# Altium PCB watch2q.PcbDoc
Units mil, origin at the board's own origin, x right, y up, seen from the top; angles counter-clockwise.
Board outline 1400 x 1450 mil, 2 copper layers (Top, Bottom), stack 61.902 mil thick; 64 components, 53 nets, 301 pads, 125 vias.
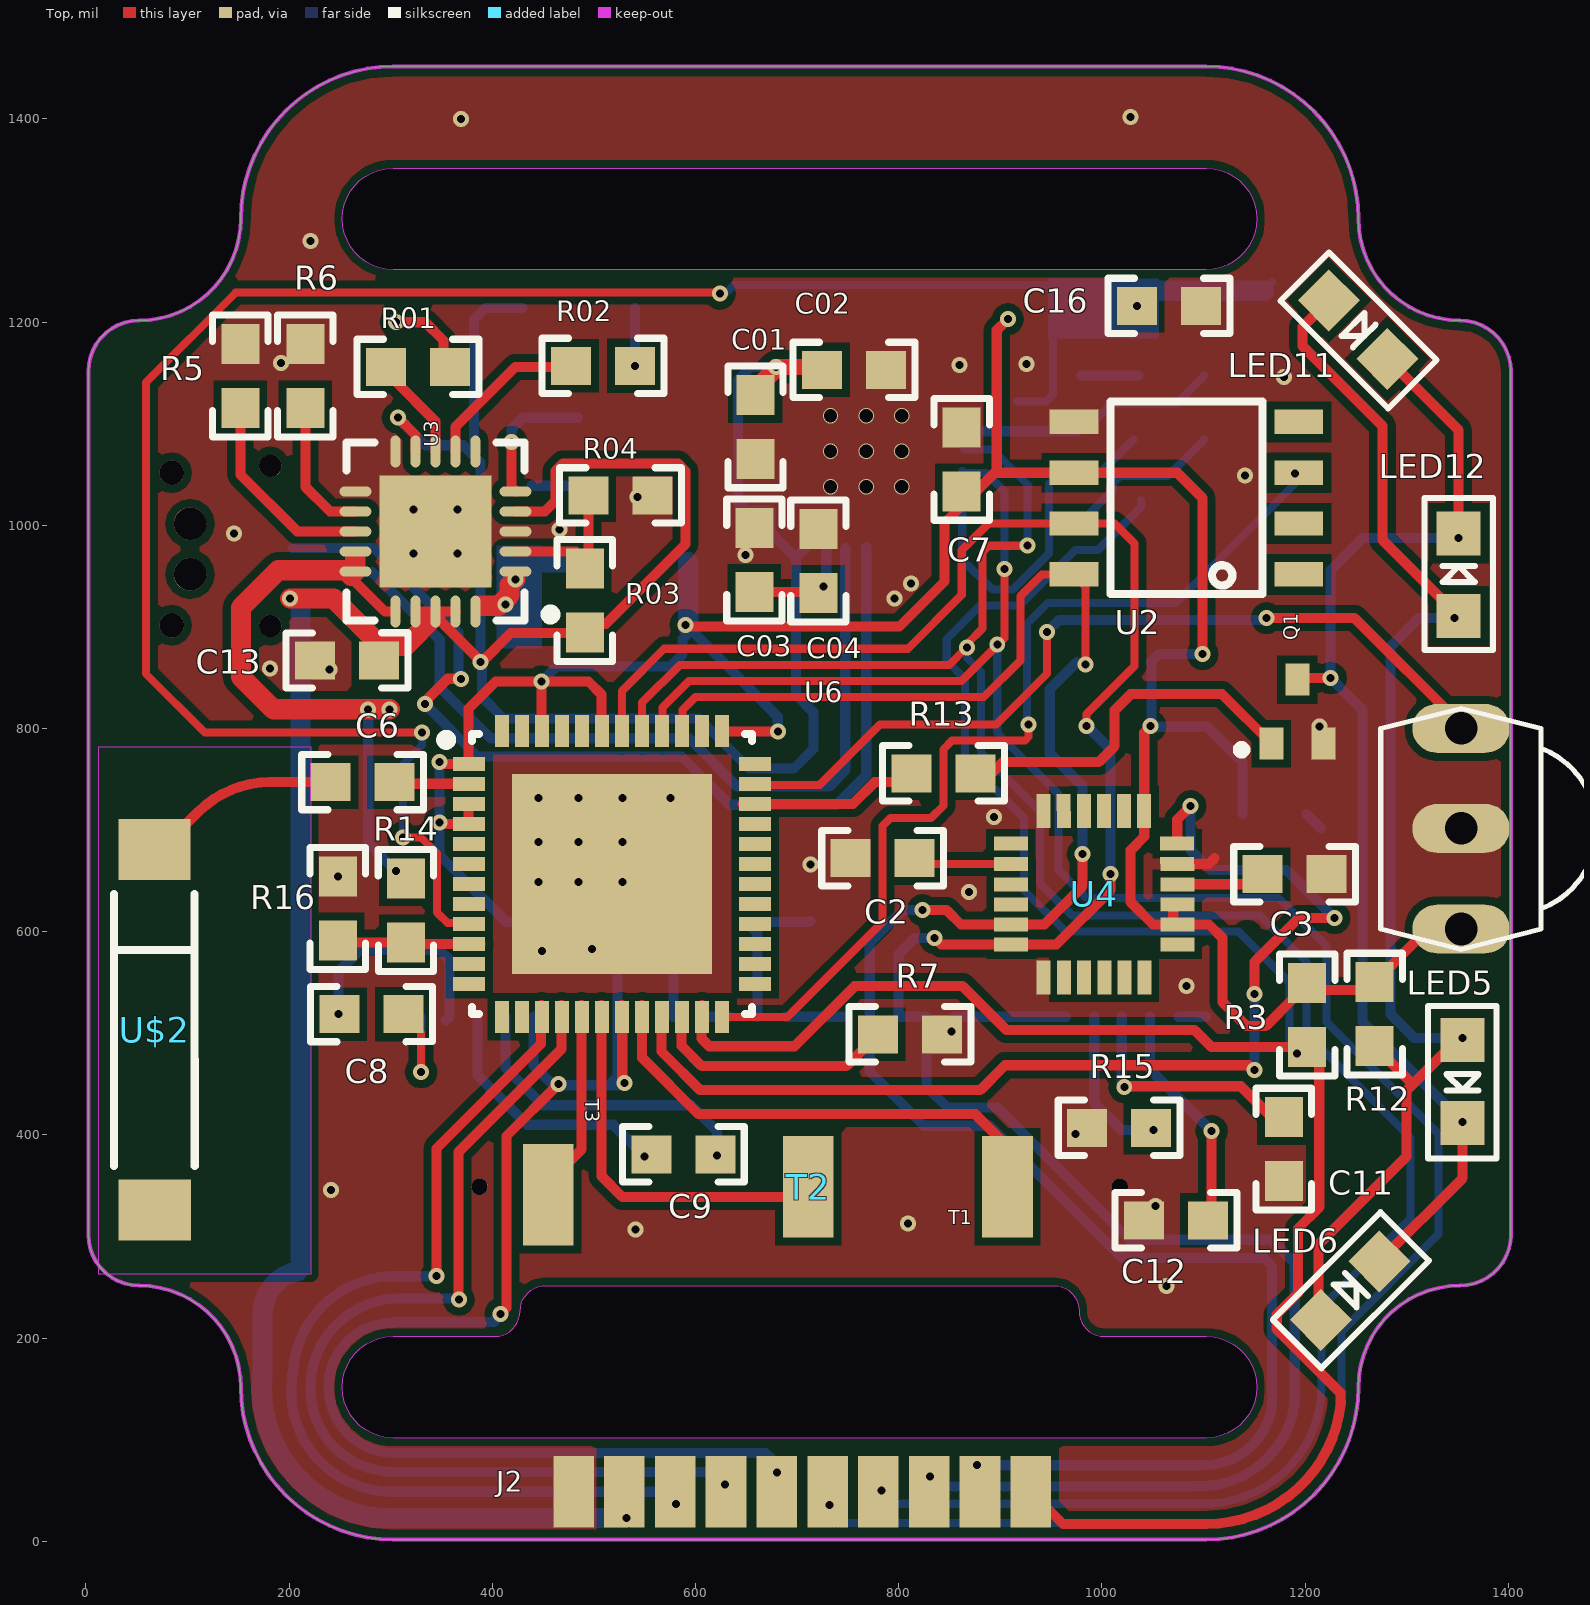
[diagram p0: Top view]
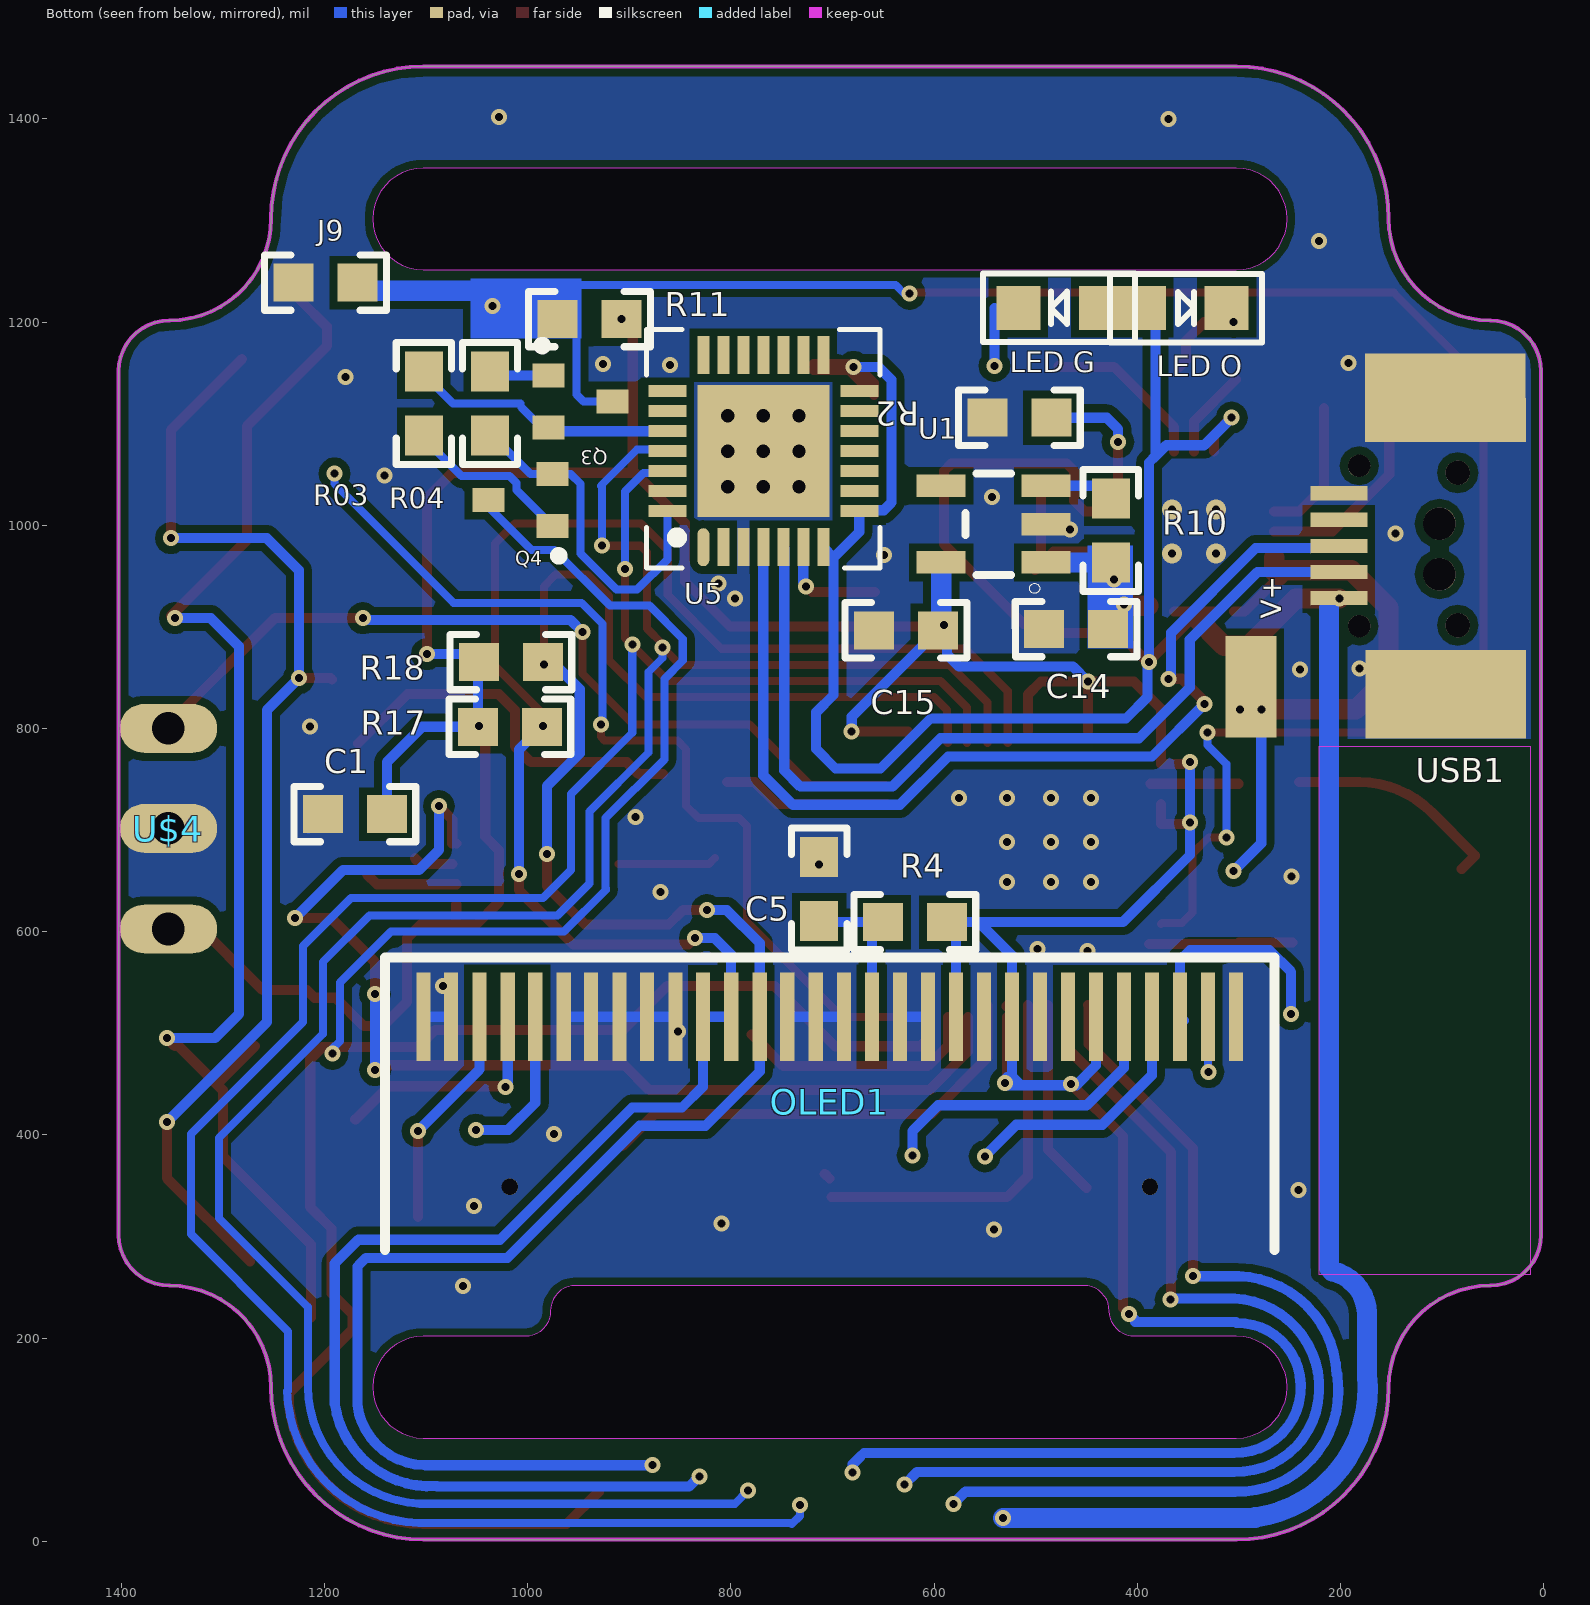
[diagram p1: Bottom view, seen from below]

## Layer stack, top to bottom
Top Solder: solder mask 0.4, Solder Resist, Dk 3.5
Top: signal copper 1.4016
Dielectric 1: core 59.0984, FR-4, Dk 4.8
Bottom: signal copper 1.4016
Bottom Solder: solder mask 0.4, Solder Resist, Dk 3.5

## Board outline
2.48,301.73 2.48,1151.73 cw(c52.48,1151.73) 52.48,1201.73 ccw(c52.48,1301.73) 152.48,1301.73 cw(c302.48,1301.73) 302.48,1451.73 1102.48,1451.73 cw(c1102.48,1301.73) 1252.48,1301.73 ccw(c1352.48,1301.73) 1352.48,1201.73 cw(c1352.48,1151.73) 1402.48,1151.73 1402.48,301.73 cw(c1352.48,301.73) 1352.48,251.73 ccw(c1352.48,151.73) 1252.48,151.73 cw(c1102.48,151.73) 1102.48,1.73 302.48,1.73 cw(c302.48,151.73) 152.48,151.73 ccw(c52.48,151.73) 52.48,251.73 cw(c52.48,301.73)
cut-out: 1102.48,201.73 cw(c1102.48,151.73) 1152.48,151.73 cw(c1102.48,151.73) 1102.48,101.73 302.48,101.73 cw(c302.48,151.73) 252.48,151.73 cw(c302.48,151.73) 302.48,201.73 402.48,201.73 ccw(c402.48,226.73) 427.48,226.73 cw(c452.48,226.73) 452.48,251.73 952.48,251.73 cw(c952.48,226.73) 977.48,226.73 ccw(c1002.48,226.73) 1002.48,201.73
cut-out: 302.48,1351.73 1102.48,1351.73 cw(c1102.48,1301.73) 1152.48,1301.73 cw(c1102.48,1301.73) 1102.48,1251.73 302.48,1251.73 cw(c302.48,1301.73) 252.48,1301.73 cw(c302.48,1301.73)

## Design rules (kind name [scope] priority, off if disabled: settings)
Clearance [All] p1: gap=7.87
HoleSize HoleSize_1 [All] p1: absolutevalues=TRUE maxlimit=100000 minlimit=13 maxpercent=80.000 minpercent=20.000
HoleSize [All] p2: absolutevalues=TRUE maxlimit=100 minlimit=1 maxpercent=80.000 minpercent=20.000
HoleToHoleClearance mdViaViaSameLayer [All] p1: gap=8 allowstackedmicrovias=TRUE
HoleToHoleClearance [All] p2: gap=10 allowstackedmicrovias=TRUE
PasteMaskExpansion mlMinCreamFrame [All] p1: expansion=0
PasteMaskExpansion [All] p2: expansion=0
PolygonConnect PolygonConnect_VIA [InNet('GND')] p1: connectstyle=Direct reliefconductorwidth=10 reliefentries=4 polygonreliefangle="90 Angle" airgapwidth=10
PolygonConnect [All] p2: connectstyle=Relief reliefconductorwidth=10 reliefentries=4 polygonreliefangle="90 Angle" airgapwidth=10
RoutingVias [All] p1: holewidth=28 width=50 viastyle="Through Hole" minholewidth=28 minwidth=50 maxholewidth=28 maxwidth=50
SilkToSilkClearance [All] p1 off: silktosilkclearance=10
SilkToSolderMaskClearance [IsPad] p1 off: minsilkscreentomaskgap=10 clearancetoexposedcopper=TRUE
SolderMaskExpansion mlMinStopFrame [All] p1: expansion=4
SolderMaskExpansion [All] p2: expansion=4
Width Width_1 [All] p1: maxlimit=100000 minlimit=6 preferedwidth=10
Width [All] p2: maxlimit=10 minlimit=10 preferedwidth=10
25 further rules are at their usual default settings.

## Components (designator, comment, footprint, x,y, rotation, side; value= is the part's Value field where it differs from the comment)
C1 "0.01uf" 0603 1170.04,715.79 r179.99 bottom
C01 "1uf" 0603 659,1097 r270 top
C2 "2.2nf" 0603 784.21,672.48 r180.01 top
C02 "0.1" 0603 756,1153 r0 top
C3 "0.1uf" 0603 1189.72,656.73 r180.02 top
C03 "0.1u" 0603 658,966 r270 top
C04 "4.7u" 0603 721,965 r270 top
C5 "100n" 0603 713,642 r90 bottom
C6 "0.01uf" 0603 272.4,747.28 r0.01 top
C7 "100n" 0603 862,1065 r90 top
C8 "1u" 0603 281,519 r0.02 top
C9 "1u" 0603 588,381 r180.02 top
C11 "4u7" 0603 1179,386 r270 top
C12 "2u2" 0603 1073,316 r180 top
C13 "10uF" 0603 257,867 r0.01 top
C14 "10uF" 0603 460,898 r359.99 bottom
C15 "10uF" 0603 627.48,896.73 r0 bottom
C16 "100n" 0603 1066,1216 r0.02 top
J2 "CHAN_RAM" CHAN_RAM 755,-148 r180 top
J9 "RST" 0603 1199,1239 r0 bottom
LED5 "LED0805" CHIPLED_0805 1355.08,452.01 r180 top
LED6 "LED0805" CHIPLED_0805 1244.84,247.28 r315 top
LED11 "LED0805" CHIPLED_0805 1252.72,1192.17 r225 top
LED12 "LED0805" CHIPLED_0805 1351.14,952.01 r0 top
"LED G" "LED0805" CHIPLED_0805 477,1214 r90 bottom
"LED O" "LED0805" CHIPLED_0805 352,1214 r270 bottom
OLED1 "DISP_OLED_UG-2864HSWEG01_NOOUTLINEWATCH" ? 702.48,561.73 r0 top
Q1 "MMBT2222A" SOT-323 1192.48,816.73 r90 top
Q3 "MMBT2222A" SOT-323 948,1122 r180 bottom (schematic designator Q1)
Q4 "MMBT2222A" SOT-323 1007,1025 r0 bottom (schematic designator Q1)
R01 "1K" 0603 327,1156 r180 top
R02 "1K" 0603 509,1157 r180 top
R2 "16K" 0603 516,1106 r0 bottom
R03 "270k" 0603 491,926 r90 top
R3 "10K" 0603 1202,518 r270.01 top
R03 "10K" 0603 1102,1120 r90 bottom
R04 "100K" 0603 526.13,1029.43 r0 top
R4 "RESISTOR0603" 0603 618.86,609.49 r179.98 bottom
R04 "10K" 0603 1037,1120 r90 bottom
R5 "4K" 0603 152,1147 r90 top
R6 "100K" 0603 216,1147 r90 top
R7 "10K" 0603 811,499 r0 top
R10 "100K" 0603 426,995 r270 bottom
R11 "100K" 0603 939,1203 r180 bottom
R12 "100K" 0603 1268.46,518.94 r270 top
R13 "4.7k" 0603 844,756 r0 top
R14 "100K" 0603 315,621 r270.01 top
R15 "390K" 0603 1017,407 r0.02 top
R16 "100K" 0603 248,623 r90 top
R17 "10K" 0603 1017.48,801.73 r179.98 bottom
R18 "10K" 0603 1016.5,865.39 r179.98 bottom
T1 "SMD2" SMD1,27-2,54#1 907,349 r180.01 top
T2 "SMD2" SMD1,27-2,54#2 711,349 r180.01 top
T3 "SMD2" SMD1,27-2,54#1 455,341 r180.01 top
U1 "3.3V" SOT23-5 541,1001 r90 bottom
U2 "DS3231MZ+" SOIC8_150MIL_SMPAD 1083.43,1026.81 r90 top
U3 "MCP73871-2CCI/ML" QFN-ML20_N 344,994 r180 top
U4 "MPU-6050" QFN.24.4X4 992.48,636.73 r90.02 top
U5 "CP2102" CP2102 768,1073 r90 bottom
U6 "ESP32-PICO-D4" PQFN50P700X700X100_HS-49N 518,657 r0 top
U$2 "ANTENNA2SMD2" ANTENNA-CHIP3 67.68,503.19 r0.02 top
U$4 "TSOP1838" TSOP18XX 1352.48,701.73 r270 bottom
USB1 "USB-MICROBLARGEPAD" USB-MICROB_LARGEPAD 201.54,979.57 r359.98 bottom
V+ "SMD2" SMD1,27-2,54#2 288,841 r0 bottom

## Footprints (in the part's own frame and the unit in brackets; to place one, negate y for a bottom-side part, rotate by r counter-clockwise, add the part's x,y. Pads: shape width x height; smd on the part's side, far side on the other; paste and mask are expansions set on the pad)
0603 [mm] "0603"
  rect 1x0.95 smd: 1(-0.8,0) 2(0.8,0)
  silkscreen extent -1.52,-0.69 1.52,0.69, body extent -0.87,-0.47 0.87,0.47, height 0.85
ANTENNA-CHIP3 [mil] "ANTENNA-CHIP3"
  rect 71x60 smd: FEED(0,178) NC(0,-177.17)
  silkscreen extent -40,-134 39,134
CHAN_RAM [mil]
  rect 40x70 smd: PIN1(-175,-196.85) PIN2(-125,-196.85) PIN3(-75,-196.85) PIN4(-25,-196.85) PIN5(25,-196.85) PIN6(75,-196.85) PIN7(125,-196.85) PIN8(175,-196.85) PIN9(225,-196.85) PIN10(275,-196.85)
CHIPLED_0805 [mm] "CHIPLED_0805"
  rect 1.1x1.1 smd: 1(0,-1.05) 2(0,1.016)
  silkscreen extent -0.85,-1.9 0.86,1.91
CP2102 [mm]
  rect 3.3x3.3 smd mask+0: 0(0,0)
  oval 0.95x0.3 smd mask+0: 1(-2.4,1.5)
  rect 0.95x0.3 smd mask+0: 2(-2.4,1) 3(-2.4,0.5) 4(-2.4,0) 5(-2.4,-0.5) 6(-2.4,-1) 7(-2.4,-1.5) 15(2.4,-1.5) 16(2.4,-1) 17(2.4,-0.5) 18(2.4,0) 19(2.4,0.5) 20(2.4,1) 21(2.4,1.5)
  rect 0.3x0.95 smd mask+0: 8(-1.5,-2.4) 9(-1,-2.4) 10(-0.5,-2.4) 11(0,-2.4) 12(0.5,-2.4) 13(1,-2.4) 14(1.5,-2.4) 22(1.5,2.4) 23(1,2.4) 24(0.5,2.4) 25(0,2.4) 26(-0.5,2.4) 27(-1,2.4) 28(-1.5,2.4)
  silkscreen extent -2.92,-2.92 3.05,2.92, body extent -2.5,-2.5 2.5,2.5, height 1
PQFN50P700X700X100_HS-49N [mm]
  rect 0.8x0.35 smd: 1(-3.575,2.75) 2(-3.575,2.25) 3(-3.575,1.75) 4(-3.575,1.25) 5(-3.575,0.75) 6(-3.575,0.25) 7(-3.575,-0.25) 8(-3.575,-0.75) 9(-3.575,-1.25) 10(-3.575,-1.75) 11(-3.575,-2.25) 12(-3.575,-2.75) 25(3.575,-2.75) 26(3.575,-2.25) 27(3.575,-1.75) 28(3.575,-1.25) 29(3.575,-0.75) 30(3.575,-0.25) 31(3.575,0.25) 32(3.575,0.75) 33(3.575,1.25) 34(3.575,1.75) 35(3.575,2.25) 36(3.575,2.75)
  rect 0.35x0.8 smd: 13(-2.75,-3.575) 14(-2.25,-3.575) 15(-1.75,-3.575) 16(-1.25,-3.575) 17(-0.75,-3.575) 18(-0.25,-3.575) 19(0.25,-3.575) 20(0.75,-3.575) 21(1.25,-3.575) 22(1.75,-3.575) 23(2.25,-3.575) 24(2.75,-3.575) 37(2.75,3.575) 38(2.25,3.575) 39(1.75,3.575) 40(1.25,3.575) 41(0.75,3.575) 42(0.25,3.575) 43(-0.25,3.575) 44(-0.75,3.575) 45(-1.25,3.575) 46(-1.75,3.575) 47(-2.25,3.575) 48(-2.75,3.575)
  rect 5x5 smd: 49(0,0)
  silkscreen extent -4.27,-3.5 3.5,3.5, body extent -3.5,-3.5 3.5,3.5, height 1
QFN-ML20_N [mm] "QFN, 20-Leads, Body 4x4mm, Pitch 0.5mm, Thermal Pad 2.8x2.8mm, IPC Medium Density"
  oval 0.8x0.25 smd: 1(-2,1) 2(-2,0.5) 3(-2,0) 4(-2,-0.5) 5(-2,-1) 11(2,-1) 12(2,-0.5) 13(2,0) 14(2,0.5) 15(2,1)
  oval 0.25x0.8 smd: 6(-1,-2) 7(-0.5,-2) 8(0,-2) 9(0.5,-2) 10(1,-2) 16(1,2) 17(0.5,2) 18(0,2) 19(-0.5,2) 20(-1,2)
  rect 2.8x2.8 smd: 21(0,0)
  silkscreen extent -3,-2.22 2.23,2.23, body extent -2.07,-2.07 2.08,2.08, height 1
QFN.24.4X4 [mm] "QFN.24.4X4"
  rect 0.85x0.35 smd: 1(-2.075,1.27) 2(-2.075,0.762) 3(-2.075,0.254) 4(-2.075,-0.25) 5(-2.075,-0.75) 6(-2.075,-1.25) 13(2.081,-1.25) 14(2.081,-0.75) 15(2.081,-0.25) 16(2.081,0.254) 17(2.081,0.762) 18(2.081,1.27)
  rect 0.35x0.85 smd: 7(-1.25,-2.075) 8(-0.75,-2.075) 9(-0.25,-2.075) 10(0.254,-2.075) 11(0.762,-2.075) 12(1.27,-2.075) 19(1.27,2.081) 20(0.762,2.081) 21(0.254,2.081) 22(-0.25,2.081) 23(-0.75,2.081) 24(-1.25,2.081)
  body extent -1.8,-1.8 1.7,1.8, height 1
SMD1,27-2,54#1 [mil] "SMD1,27-2,54"
  rect 50x100 smd paste+0: 1(0,0)
SMD1,27-2,54#2 [mil] "SMD1,27-2,54"
  rect 50x100 smd: 1(0,0)
SOIC8_150MIL_SMPAD [mil] "SOIC8_150MIL_SMPAD"
  rect 24x48 smd: 1(-75,-110.24) 2(-25,-110.24) 3(25,-110.24) 4(75,-110.24) 5(75,111) 6(25,111) 7(-25,111) 8(-75,111)
  silkscreen extent -94,-75 95,75, body extent -90,-100 95,100, height 39
SOT23-5 [mil] "SOT23-5"
  rect 22x48 smd: 1(-37.4,-51.18) 2(0,-51.18) 3(38,-51.18) 4(38,52) 5(-37.4,52)
  silkscreen extent -68,-45 50,28
SOT-323 [mm] "Zetex recommended land pattern.  March 2007"
  rect 0.8x0.6 smd: 1(-0.8,0.65) 2(-0.8,-0.65) 3(0.8,0)
  silkscreen extent -1.05,1.31 -0.86,1.49, body extent -1.13,-1.13 1.12,1.12, height 1.13
TSOP18XX [mil] "TSOP18XX"
  oval 48x96 hole 32: GND(-0.05,-1.05) OUT(-98.47,-1.05) VCC(99,-1.05)
USB-MICROB_LARGEPAD [mil] "USB-MICROB_LARGEPAD"
  round 22 hole 22: 1(-20,78.74) 1(-20,-79)
  rect 56x14 smd: D+(0,0) D-(0,25.59) GND(0,-52) ID(0,-26) VBUS(0,51.18)
  rect 158x87 smd: MT1(-105,145.67) MT2(-105,-146)
? [mil] "UG-2864HSWEG01_1.3_WRAPAROUND_WATCH"
  rect 14x87 smd far side: 1(-399.61,-45.37) 2(-372.05,-45.37) 3(-344.49,-45.37) 4(-316.93,-45.37) 5(-289.37,-45.37) 6(-261.81,-45.37) 7(-234.25,-45.37) 8(-206.69,-45.37) 9(-179.13,-45.37) 10(-151.57,-45.37) 11(-124.02,-45.37) 12(-96.46,-45.37) 13(-68.9,-45.37) 14(-41.34,-45.37) 15(-13.78,-45.37) 16(14,-45.37) 17(42,-45.37) 18(69,-45.37) 19(97,-45.37) 20(125,-45.37) 21(152,-45.37) 22(180,-45.37) 23(207,-45.37) 24(235,-45.37) 25(262,-45.37) 26(290,-45.37) 27(317,-45.37) 28(345,-45.37) 29(373,-45.37) 30(400,-45.37)
  round 16 hole 16: 1(-314.96,-212.7) 1(315,-212.7)

## Part data
C1 C01 C2 C02 C3 C03 C04 C5 C6 C7 C8 C9 C11 C12 C13 C14 C15 C16 J9: library part CAP_CERAMIC0603, "Ceramic Capacitors0402 - 0402 Surface Mount Capacitors  16pF 50V 5% [Digikey: 445-4899-2-ND]  18pF 50V 5% [Digikey: 490-1281-2-ND]  22pF 50V 5% [Digikey: 490-1283-2-ND]  68pF 50V 5% [Digikey: 490-1289-2-ND]  0.1uF 10V 10% [Digikey: 490-1318-2-ND]  1.0uF 6.3V 10% [Digikey: 490-1320-2-ND]    0603 - 0603 Surface Mount Capacitors  16 pF 50V 5% [Digikey: 445-5051-2-ND]  22 pF 50V [Digikey: PCC220ACVTR-ND]  33 pF 50V 5% [Digikey: 490-1415-1-ND]  56pF 50V 5% [Digikey: 490-1421-1-ND]  220pF 50V 5% [Digikey: 445-1285-1-ND]  680 pF 50V   2200 pF 50V 5% C0G [Digikey: 445-1297-1-ND]  5600 pF 100V 5% X7R [Digikey: 478-3711-1-ND]  0.1 µF 25V 10% [Digikey: PCC2277TR-ND]  0.22 µF 16V 10% X7R [Digikey: 445-1318-1-ND]  1.0 µF 25V 10% [Digikey: 445-5146-2-ND]    0603 - RF Specific  3pF 250V +/-0.1pF RF [Digikey: 712-1347-1-ND]  18 pF 250V 5%  [Digikey: 478-3505-1-ND or 712-1322-1-ND]  56 pF 250V 5% C0G RF [Digikey: 490-4867-1-ND]  68 pF 250V RF [Digikey: 490-4868-1-ND]    0805 - 0805 Surface Mount Capacitors  220 pF 250V 2% RF Ceramic Capacitor [Digikey: 712-1398-1-ND]  1000 pF 50V 2% NP0 Ceramic Capacitor [Digikey: 478-3760-1-ND]  0.1 µF 25V 10% Ceramic Capacitor [Digikey: PCC1828TR-ND]  1.0 µF 16V 10% Ceramic Capacitor[Digikey: 490-1691-2-ND]  10.0 µF 10V 10% Ceramic Capacitor[Digikey: 709-1228-1-ND]  10.0 uF 16V 10% Ceramic Capacitor [Digikey: 478-5165-2-ND]  47 uF 6.3V 20% Ceramic Capacitor [Digikey: 587-1779-1-ND or 399-5506-1-ND]       1206 - 1206 Surface Mount Capacitors  47uF 10V 20% Ceramic Capacitor [Digikey: 490-5528-1-ND or 399-5508-1-ND or 445-6010-1-ND]  100uF 6.3V -20%, +80% Y5V Ceramic Capacitor (Digikey: 490-4512-1-ND, Mouser: 81-GRM31CF50J107ZE1L)"
LED5 LED6 LED11 LED12 "LED G" "LED O": "LED0603 - 0603 Surface Mount Package    2mA: Green LED - Low Power (3.9mcd, 2ma, 1.7Vf) - Digikey: 475-2709-2-ND  Orange LED - Low Power (9.8mcd, 2ma, 1.8Vf) - Digikey: 475-1194-2-ND  Red LED - Low Power (5mcd, 2ma, 1.8Vf) - Digikey: 475-1195-2-ND  Yellow LED - Low Power (7mcd, 2ma, 1.8Vf) - Digikey: 475-1196-2-ND       5mA: Blue LED - Low Power (17mcd, 5ma, 2.9Vf) - Digikey: LNJ937W8CRACT-ND    0805 - 0805 Surface Mount Package    2mA: Red LED (8.8mcd, 2mA, 1.8Vf, Clear) - Low Power [Digikey: 475-2510-1-ND]  Green LED (5mcd, 2mA, 1.8Vf, Clear) - Low Power [Digikey: 475-2730-1-ND]  Yellow LED (11.3mcd, 2mA, 1.8Vf, Clear) - Low Power [Digikey: 475-2555-1-ND]       20mA: Red LED (104mcd, 20mA, Diffused) - LS R976 [Digikey: 475-1278-6-ND]  Red LED (12mcd, 20mA, 2.0Vf, Clear) - APT2012EC [Digikey: 754-1128-1-ND]  Green LED (15mcd, 20mA, 2.2Vf, Clear) - APT2012GC [Digikey: 754-1131-1-ND]  Orange LED (160mcd, 20mA, 2.1Vf, Clear) - APT2012SECK [Digikey: 754-1130-1-ND]     1206 - 1206 Surface Mount Package  Green LED (26mcd, 20mA, Diffused) - LG N971  [Digikey: 475-1407-6-ND]  Red LED (15mcd, 20mA, Diffused) - LH N974 [Digikey: 475-1416-6-ND]"
Q1 Q3 Q4: "NPN switching transistor  40V 600mA SOT23"
R01 R02 R2 R03 R3 R03 R04 R04 R5 R6 R7 R10 R11 R12 R13 R14 R15 R16 R17 R18: library part RESISTOR0603, "Resistors0402 - 0402 Surface Mount Package  22 Ohm 1% 1/16W [Digikey: 311-22.0LRTR-ND]  33 Ohm 5% 1/16W  1.0K 5% 1/16W  1.5K 5% 1/16W  2.0K 1% 1/16W  10.0K 1% 1/16W [Digikey: 311-10.0KLRTR-ND]  10.0K 5% 1/16W [Digikey: RMCF0402JT10K0TR-ND]  12.1K 1% 1/16W [Digikey: 311-22.0LRTR-ND]  100.0K 5% 1/16W    0603 - 0603 Surface Mount Package  0 Ohm 1/10 Watt 1% Resistor  15 Ohm 1/10 Watt 1% Resistor  33 Ohm 1/10 Watt 1% Resistor  49.9 Ohm 1/10 Watt 1% Resistor  100 Ohm 1/10 Watt 1% Resistor  150 Ohm 1/10 Watt 1% Resistor  240 Ohm 1/10 Watt 1% Resistor  390 Ohm 1/10 Watt 1% Resistor  560 Ohm 1/10 Watt 1% Resistor  680 Ohm 1/10 Watt 1% Resistor  750 Ohm 1/10 Watt 1% Resistor  1.0K Ohm 1/10 Watt 1% Resistor  1.5K Ohm 1/10 Watt 1% Resistor  2.0K Ohm 1/10 Watt 1% Resistor  2.2K Ohm 1/10 Watt 1% Resistor  3.3K Ohm 1/10 Watt 1% Resistor  4.7K Ohm 1/10 Watt 1% Resistor  10.0K Ohm 1/10 Watt 1% Resistor  12.0K Ohm 1/10 Watt 1% Resistor  12.1K Ohm 1/10 Watt 1% Resistor  20.0K Ohm 1/10 Watt 1% Resistor  33.0K Ohm 1/10 Watt 1% Resistor  100.0K Ohm 1/10 Watt 1% Resistor    0805 - 0805 Surface Mount Package  0 Ohm 1/8 Watt 1% Resistor  33 Ohm 1/8 Watt 1% Resistor  100 Ohm 1/8 Watt 1% Resistor  150 Ohm 1/8 Watt 1% Resistor  200 Ohm 1/8 Watt 1% Resistor  240 Ohm 1/8 Watt 1% Resistor  330 Ohm 1/8 Watt 1% Resistor  390 Ohm 1/8 Watt 1% Resistor  470 Ohm 1/8 Watt 1% Resistor  1.0K Ohm 1/8 Watt 1% Resistor  1.5K Ohm 1/8 Watt 1% Resistor  2.0K Ohm 1/8 Watt 1% Resistor  4.7K Ohm 1/8 Watt 1% Resistor  5.1K Ohm 1/8 Watt 1% Resistor  5.6K Ohm 1/8 Watt 1% Resistor  10.0K Ohm 1/8 Watt 1% Resistor  22.0K Ohm 1/8 Watt 1% Resistor  33.0K Ohm 1/8 Watt 1% Resistor  100K Ohm 1/8 Watt 1% Resistor    1206 - 1206 Surface Mount Package  2012 - 2010 Surface Mount Package  0.11 Ohm 1/2 Watt 1% Resistor - Digikey: RHM.11UCT-ND"
R4: "Resistors0402 - 0402 Surface Mount Package  22 Ohm 1% 1/16W [Digikey: 311-22.0LRTR-ND]  33 Ohm 5% 1/16W  1.0K 5% 1/16W  1.5K 5% 1/16W  2.0K 1% 1/16W  10.0K 1% 1/16W [Digikey: 311-10.0KLRTR-ND]  10.0K 5% 1/16W [Digikey: RMCF0402JT10K0TR-ND]  12.1K 1% 1/16W [Digikey: 311-22.0LRTR-ND]  100.0K 5% 1/16W    0603 - 0603 Surface Mount Package  0 Ohm 1/10 Watt 1% Resistor  15 Ohm 1/10 Watt 1% Resistor  33 Ohm 1/10 Watt 1% Resistor  49.9 Ohm 1/10 Watt 1% Resistor  100 Ohm 1/10 Watt 1% Resistor  150 Ohm 1/10 Watt 1% Resistor  240 Ohm 1/10 Watt 1% Resistor  390 Ohm 1/10 Watt 1% Resistor  560 Ohm 1/10 Watt 1% Resistor  680 Ohm 1/10 Watt 1% Resistor  750 Ohm 1/10 Watt 1% Resistor  1.0K Ohm 1/10 Watt 1% Resistor  1.5K Ohm 1/10 Watt 1% Resistor  2.0K Ohm 1/10 Watt 1% Resistor  2.2K Ohm 1/10 Watt 1% Resistor  3.3K Ohm 1/10 Watt 1% Resistor  4.7K Ohm 1/10 Watt 1% Resistor  10.0K Ohm 1/10 Watt 1% Resistor  12.0K Ohm 1/10 Watt 1% Resistor  12.1K Ohm 1/10 Watt 1% Resistor  20.0K Ohm 1/10 Watt 1% Resistor  33.0K Ohm 1/10 Watt 1% Resistor  100.0K Ohm 1/10 Watt 1% Resistor    0805 - 0805 Surface Mount Package  0 Ohm 1/8 Watt 1% Resistor  33 Ohm 1/8 Watt 1% Resistor  100 Ohm 1/8 Watt 1% Resistor  150 Ohm 1/8 Watt 1% Resistor  200 Ohm 1/8 Watt 1% Resistor  240 Ohm 1/8 Watt 1% Resistor  330 Ohm 1/8 Watt 1% Resistor  390 Ohm 1/8 Watt 1% Resistor  470 Ohm 1/8 Watt 1% Resistor  1.0K Ohm 1/8 Watt 1% Resistor  1.5K Ohm 1/8 Watt 1% Resistor  2.0K Ohm 1/8 Watt 1% Resistor  4.7K Ohm 1/8 Watt 1% Resistor  5.1K Ohm 1/8 Watt 1% Resistor  5.6K Ohm 1/8 Watt 1% Resistor  10.0K Ohm 1/8 Watt 1% Resistor  22.0K Ohm 1/8 Watt 1% Resistor  33.0K Ohm 1/8 Watt 1% Resistor  100K Ohm 1/8 Watt 1% Resistor    1206 - 1206 Surface Mount Package  2012 - 2010 Surface Mount Package  0.11 Ohm 1/2 Watt 1% Resistor - Digikey: RHM.11UCT-ND"
T1 T2 T3 V+: "SMD PAD"
U1: library part V_REG_AP2112K-3.3V, "AP2112 - 600mA CMOS LDO Regulator w/ Enable    The AP2112 is CMOS process low dropout linear regulator with enable function, the regulator delivers a guaranteed 600mA (min.) continuous load current.   Features  Output Voltage Accuracy: ±1.5%   Output Current: 600mA (Min.)   Foldback Short Current Protection: 50mA   Enable Function to Turn ON/OFF VOUT  Low Dropout Voltage (3.3V): 250mV (Typ.) @IOUT=600mA   Excellent Load Regulation: 0.2%/A (Typ.)   Excellent Line Regulation: 0.02%/V (Typ.)   Low Quiescent Current: 55µA (Typ.)  Low Standby Current: 0.01µA (Typ.)  Low Output Noise: 50µVRMS   PSRR: 100Hz -65dB, 1kHz -65dB    OTSD Protection   Stable  with  1.0µF Flexible Cap: Ceramic, Tantalum and Aluminum Electrolytic   Operation Temperature Range: -40°C to 85°C   ESD: MM 400V, HBM 4000V"
U2: library part DS3231MZ+SMPAD
U3: "Stand-Alone System Load Sharing and Li-Ion/Li-Polymer Battery Charge Management Controller, 4.2V, 20-Pin QFN, Industrial Temperature"
U$2: "Chip antenna   Single endded antenna. Common with smaller chip antennas. CHIP4 package is the GPS Chip Antenna SKU: GPS-08418. CHIP5 package is 2.4GHz chip antenna SKU: WRL-00144."
U$4: "IR Receiver and Demodulator"

## Free pads (board coordinates)
  round 24 hole 24: 1(84.48,901.73) 1(84.48,1051.73)
  round 32 hole 32: 1(102.48,951.73) 1(102.48,1001.73)

## Via types
v1: diameter 15.75, hole 7.87, Top to Bottom, tented both sides, 85 vias
v2: diameter 15.75, hole 7.87, Top to Bottom, 26 vias
v3: diameter 15, hole 13, Top to Bottom, 9 vias
v4: diameter 19.68, hole 7.87, Top to Bottom, 4 vias
v5: diameter 15.75/15.75 (per signal layer), hole 7.87, Top to Bottom, 1 vias

## Nets (pads, with @x,y where several pads share a name; then routed paths per layer and width w, separated by ;. In a path a pad name is that pad's centre, name@x,y a point inside that pad or via, vN(x,y) a via of type N, cw(c..) or ccw(c..) an arc to the next point about the centre after c; other vN are vias at no path point)
3.3V: C1.2 C7.1 C15.1 J2.PIN6 OLED1.6 OLED1.9 OLED1.11 R3.1 R4.2 R11.2 R12.1 R17.1 R18.1 U1.5 U2.6 U4.8 U4.9 U4.13 U6.1 U6.3 U6.4 U6.19 U6.37 U6.43 U6.46 U$4.VCC | length 4455.3
  Top w10: v1@345.06,705.94 U6.4@376.73,705.94 ; v1@350,765 376.73,765 376.73,819.73 403.35,846.35 v1(448.44,846.35) 494.65,846.35 507.64,833.36 U6.43@507.64,797.48 ; U6.4@376.73,705.94 U6.3@376.73,725.63 ; v2(408,224) 413.99,229.99 413.99,398.99 v2(465,450) ; U6.46@448.58,797.48 v1@448.58,846.22 ; v1@527.84,453.16 U6.19 ; v2@590.99,900.51 800.85,900.51 845.13,944.79 845.13,1002.36 896.48,1053.72 ; U6.37@625.82,796.1 625.82,797 v1(681,797) ; v1(907.5,1203) 896.48,1191.98 896.48,1053.72 ; v1(1047.99,802.4) 1041.67,796.08 U4.13 1041.67,693.71 1028.31,680.35 1028.31,629.17 1050.24,607.24 1070.24,607.24 U4.9@1070.24,626.91 ; U4.8 1105.37,607.23 1118.86,593.74 1118.86,530.75 1142.48,507.13 1161.13,507.13 1189,535 1209.72,535 1217.28,542.56 1260.59,542.56 R12.1 1320.76,602.73 U$4.VCC ; v1(1099.17,873.27) 1099.17,1026.81 1074.17,1051.81 U2.6 898.39,1051.81 896.48,1053.72
  Bottom w10: 239.86,162.89 cw(c301.36,152.65) 302,215 ; 239.99,162.87 ccw(c303.5,151.5) 305,87 669,87 ; 302.76,215.76 401.96,215.76 401.96,217.96 v2(408,224) ; v1@348,701.75 v1(348,707.41) ; v1(348,767) v1(348,707.41) ; OLED1.6 440.67,468.32 459.98,449 513.03,449 ; v1(448.44,846.35) 463.09,861 575.09,861 587.36,873.27 587.36,888.11 C15.1 681,811.72 v1(681,797) ; v2@458.98,450 v2(465,450) ; v1@528,457 528,449 514.69,449 523.35,457.65 OLED1.9 523.35,576.97 555.88,609.5 ; OLED1.11 578.46,600.6 R4.2 555.88,609.5 ; 672.24,83.76 680,76 v2(680,68) ; v1(1099.17,873.27) 1055.88,873.27 R18.1 1048.98,864.4 R17.1 1103.79,801.72 1138.54,766.97 C1.2 ; U$4.VCC@1346.77,609.49 U$4.VCC ; v1(348,707.41) 348,675.62 414.12,609.5 555.88,609.5
  Bottom w20: C15.1@593,899.72 U1.5
  other v1: 530,451
  other v2: 590,902
ANT: C6.1 U$2.FEED | length 217.7
  Top w10: U$2.FEED@67.43,674.73 U$2.FEED@67.53,674.84 ; U$2.FEED@80.53,661.74 67.53,674.73 U$2.FEED@67.53,674.84 ; C6.1 181.39,747.28 ccw(c181.39,647.28) 110.68,717.99 U$2.FEED@67.53,674.84
BAT_VOL: R14.2 R16.1 U6.10 | length 140.8
  Top w10: R16.1@247,589.5 R14.2@299.67,589.5 ; R14.2@303,586.77 301.94,587.83 U6.10@388.54,587.83
D+: U5.4 USB1.D+ | length 1000.1
  Top w10: v1(334,824) 334,825 333,826 356,849 v1(369,849)
  Bottom w10: USB1.D+@203.43,977.67 283.33,977.67 366.62,894.38 v1@366.62,851.38 ; v1(334,824) 385.42,772.58 586.14,772.58 633.72,725 738.9,725 768,754.1 U5.4
D-: U5.5 USB1.D- | length 886.3
  Bottom w10: USB1.D- 281.75,953.98 348.25,887.47 348.25,840.41 398.2,790.46 593.54,790.46 641.13,742.87 731.49,742.87 747.41,758.79 U5.5@747.41,977.61
DTR: Q4.2 R04.1@1037,1088.5 U5.28 | length 329.7
  Bottom w8: U5.28 862.49,966.58 892.2,936.87 912.42,936.87 947.88,972.33 947.88,1016.26 948,1016.38 948,1041 957.59,1050.59 Q4.2 997.29,1050.59 R04.1@1031.2,1084.5
GND: C1.1 C01.2 C02.2 C2.2 C03.1 C3.1 C04.1 C5.2 C7.2 C11.2 C12.2 C13.1 C14.2 C15.2 C16.2 J2.PIN10 J9.2 OLED1.1 OLED1.8 OLED1.10 OLED1.12 OLED1.13 OLED1.15 OLED1.16 OLED1.17 OLED1.21 OLED1.22 OLED1.23 OLED1.24 OLED1.25 OLED1.29 OLED1.30 Q1.2 R2.2 R04.2@557.62,1029.43 R5.2 R6.2 R7.2 R15.1 R16.2 U1.2 U2.5 U3.3 U3.10 U3.11 U3.21 U4.1 U4.11 U4.18 U5.0 U5.3 U6.49 U$4.GND USB1.GND USB1.MT1 USB1.MT2 | length 279.3
  Top w10: U4.11 1105.26,666.76 1110.98,672.48
  Bottom w10: OLED1.12 OLED1.13 ; OLED1.15 OLED1.16 OLED1.17 ; OLED1.21 OLED1.22 OLED1.23 OLED1.24 OLED1.25 ; OLED1.29 OLED1.30 ; C1.1 C1.1@1215.54,701.78
  other v1: 1063.74,251.22 541,307 1053,330 852,502 1083.43,546.5 449,581 869,639 445.63,648.86 485,648.86 528.31,648.86 248,654.5 713,666 445.63,688.23 485,688.23 528.31,688.23 894,713 445.63,731.54 485,731.54 528.31,731.54 575.55,731.54 240,858 181,859 796,928 812,943 649,971 466,996 543,1028 1141,1049 1179,1146 860,1158 926,1159 192,1160 369,1400
  other v2: 809,313 241,346 974,401 498,583 1214,802 146,992 221,1280 1028,1402
  other v3: 733,1038 768,1038 803,1038 733,1073 768,1073 803,1073 733,1108 768,1108 803,1108
  other v4: 322.35,972.35 365.65,972.35 322.35,1015.65 365.65,1015.65
IO0: J2.PIN1 Q4.3 R3.2 U6.23 | length 2368.1
  Top w10: U6.23@606.07,515.99 606.07,494.83 613.53,487.36 697.52,487.36 756.65,546.5 862.95,546.5 906.26,503.19 1091.3,503.19 1107.98,486.5 R3.2 1214,474.51 1214,329 1193,308 1193,244.27 1172.11,223.39 1172.11,208.89 1234.7,146.3 1234.7,137 ; U6.23@606.48,511.63 U6.23@606.48,527.8 ; J2.PIN1 961.7,17.15 1103.1,17.15 ccw(c1103.08,149.99) 1235.27,136.94
  Bottom w8: Q4.3 1038.5,1018.05 996.17,975.72 973.72,975.72 919,921 880.04,921 847.25,888.21 847.25,867.03 865.38,848.9 865.38,769.74 923.19,711.93 923.19,642.93 923.13,642.87 923.13,641.13 964.07,600.19 1134.49,600.19 1184.72,549.95 1184.72,492.29 1192,485.01 v1(1192,480)
IO2: R7.1 U6.22 | length 249.9
  Top w10: 586.38,494.83 586.38,487.62 ; U6.22@586.38,515.99 586.38,487.62 ; R7.1 748.26,467.76 606.24,467.76 586.38,487.62
IRLED: R13.1 U6.34 | length 166.3
  Top w10: U6.34@646.48,725.73 754.79,725.73 776.34,747.28 R13.1@803.9,747.28
IRREV1: U6.35 U$4.OUT | length 840.3
  Top w8: U6.35@647.75,744.46 722,744.46 781.54,804 896.05,804 946,853.95 v1@946,891
  Top w10: v1(1162.17,908.7) 1248.78,908.7 1353.53,803.95 U$4.OUT
  Bottom w10: v1(946,895) 958,907 v1@1162.17,907
LNA: C6.2 U6.2 | length 86.5
  Top w10: C6.2@300.48,745.73 U6.2@387,745.73
MPUINT: U4.12 U6.21 | length 1093.2
  Top w10: 566.7,482.03 U6.21@566.7,515.99 ; 568.51,480.22 604.59,444.13 880.13,444.13 904.63,468.63 v2@1144.37,468.63 ; U4.12 1074.16,710.46 v1(1087.36,723.66) ; v1(1150.35,538.62) 1150.35,570.35 1193.43,613.43 v1(1229.09,613.43)
  Bottom w10: v1(1087.36,723.66) 1087.36,680.35 1107.05,660.67 1181.85,660.67 v1(1229.09,613.43) ; v2@1150.35,463.82 v1(1150.35,538.62)
  other v2: 1150,464
NetC2_1: C2.1 U4.20 | length 97.2
  Top w7.87: C2.1 821.49,666.71 U4.20
NetC3_2: C3.2 U4.10 | length 92.1
  Top w10: U4.10@1070.23,646.76 1148.26,646.76 C3.2
NetC03_2: C03.2 C04.2 U5.6 | length 95.9
  Top w10: C03.2 C04.2@720,934.5
  Bottom w10: v1@728.63,944.63 U5.6
  other v1: 726,940
NetC5_1: C5.1 OLED1.14 R4.1 | length 160.7
  Bottom w10: OLED1.14 661.14,598.69 R4.1 711.97,609.48 C5.1
NetC8_1: C8.1 OLED1.3 | length 225
  Bottom w10: v2(248.5,518.99) 248.5,560.5 270,582 348,582 357.99,572.01 OLED1.3 OLED1.3@354.25,512.62
NetC8_2: C8.2 OLED1.2 | length 92.4
  Top w7.87: v2(330,462) C8.2@330,500.51
  Bottom w7.87: v2@330.43,462.43 OLED1.2
NetC9_1: C9.1 OLED1.5 | length 308
  Bottom w10: OLED1.5 413.11,465.89 449.75,429.25 595.75,429.25 621,404 v2(621,380)
NetC9_2: C9.2 OLED1.4 | length 255.1
  Bottom w10: OLED1.4 385.55,458.79 434.34,410 519,410 v2(550,379)
NetC11_1: C11.1 OLED1.27 | length 232.3
  Top w10: v1(1022,447) 1023,448 1136.66,448 1169.16,415.5 C11.1@1170,415.5
  Bottom w10: OLED1.27 1019.48,449.52 v1(1022,447)
NetC12_1: C12.1 OLED1.28 | length 221.9
  Top w10: C12.1@1108,319.51 v2(1108,403.81)
  Bottom w10: OLED1.28 1047.48,464.33 v2(1108,403.81)
NetLED5_1: LED5.1 LED6.1 LED11.1 LED12.1 R12.2 | length 1298.6
  Top w10: LED6.1@1213.35,220.32 1213.35,292.35 1299.96,378.96 1299.96,443.96 LED5.1@1343.44,487.44 ; LED11.1 1197.6,1195.51 1197.6,1176.42 1276.34,1097.68 1276.34,985.47 LED12.1 LED12.1@1349.17,910.67 ; R12.2 1301.91,454 ; LED5.1@1351.32,495.32 LED5.1@1343.44,487.44 ; v1(1355.08,495.32) 1347.2,487.44 LED5.1@1343.44,487.44
  Bottom w10: v1(1347.2,908.7) 1311.77,908.7 1284.21,881.14 1284.21,518.94 1307.83,495.32 v1(1355.08,495.32)
NetLED5_2: LED5.2 LED6.2 LED11.2 LED12.2 Q1.3 | length 1140.7
  Top w10: Q1.3 1193.9,849.65 v1(1225.16,849.65) ; LED6.2 1355.08,357.52 LED5.2 ; LED11.2 1351.14,1093.74 LED12.2
  Bottom w10: v1(1351.14,987.44) 1256.65,987.44 1225.16,955.95 v1(1225.16,849.65) 1256.65,818.15 1256.65,511.06 v1(1355.08,412.64)
"NetLED G_2": "LED G.2" R02.1 | length 56.6
  Bottom w10: v1(540.5,1157) 540.5,1213.65
"NetLED O_2": "LED O.2" R01.1 | length 83.1
  Top w10: v1(305,1200) 334,1200 352,1182 352,1162.5 R01.1
NetOLED1_26: OLED1.26 R15.2 | length 154.3
  Bottom w10: OLED1.26 992.48,431.52 1019,405 v2(1051,405)
NetQ1_1: Q1.1 R13.2 | length 373.5
  Top w10: R13.2@866.89,755.16 890.51,755.16 902.32,766.97 996.81,766.97 1012.56,782.72 1012.56,818.15 1028.31,833.9 1118.23,833.9 Q1.1
NetQ3_1: Q3.1 R04.2@1037,1151.5 | length 56.4
  Bottom w10: Q3.1 R04.2@1035.91,1147.59
NetQ4_1: Q4.1 R03.1@1102,1088.5 | length 164.8
  Bottom w8: Q4.1 1010.87,1034.78 1010.87,1041.73 1017.83,1048.69 1065.18,1048.69 R03.1@1101,1084.5
NetR01_2: R01.2 U3.8 | length 87.7
  Top w10: R01.2@303,1143.5 344,1102.5 U3.8
NetR2_1: R2.1 U3.5 | length 133.5
  Top w10: v1(419,1082) 419,1037.63 423,1033.63 U3.5
  Bottom w10: v1(419,1082) 419,1095 430,1106 R2.1
NetR02_2: R02.2 U3.7 | length 162.9
  Top w10: U3.7 363.68,1096.9 422.79,1156 476.5,1156 R02.2
NetR03_2: R03.2@491,957.5 R04.1@494.63,1029.43 U3.2 | length 152.9
  Top w10: U3.2 482.19,974.31 R03.2@494.63,961.87 ; R04.1@494.63,1029.43 R03.2@494.63,961.87 ; R03.2@500.5,956 R03.2@494.63,961.87
NetR5_1: R5.1 U3.13 | length 202.9
  Top w10: R5.1@152,1116.5 152,1050 207.92,994.08 U3.13@265.26,994.08
NetR6_1: R6.1 U3.12 | length 134.1
  Top w10: R6.1 216,1038.09 238.51,1015.57 ; 240.4,1013.69 U3.12
NetR10_1: R10.1 U1.3 | length 51.3
  Bottom w10: R10.1@438.51,1039 U1.3
RESET: C16.1 J9.1 Q3.3 R11.1 U6.9 | length 2173.7
  Top w7.87: v1(312,693) 329.58,693 345.51,677.07 345.51,619.08 356.09,608.5 375.75,608.5 U6.9@376.73,607.52 ; v1(331,796) 117,796 59,854 59,1140.59 147.41,1229 v1@624,1229
  Bottom w7.87: v1(312,693) 312,764.93 331,783.93 v1(331,796) ; v1(624,1228) 629.24,1228 638,1236.76 987.24,1236.76 1004.88,1217.42 1005.14,1217.14 ; Q3.3 945,1122 951.94,1128.94 R11.1@951.94,1184.44 ; 1004.5,1201 1012.49,1201 ; 1010.49,1203 1012.49,1205 1015,1207.51 ; J9.1@1159.5,1231 J9.1
  Bottom w10: 1015,1207.51 1016.9,1205.75 1017.81,1204.91 1021.26,1201.71 1035.21,1188.79
  Bottom w15: R11.1 1010.49,1203 1014.49,1203 1012.49,1205 1002.49,1215 1003,1215 1005.14,1217.14 1011,1223
  Bottom w20: v2(1034.5,1215.99) 1049.51,1231 J9.1@1159.5,1231
RTC_INT: U2.3 U6.24
RTS: Q3.2 R03.2@1102,1151.5 U5.24 | length 253.3
  Bottom w7.87: Q3.2 986.41,1096.41 1006,1116 ; 1007,1120 1073.5,1120 R03.2@1101,1147.5
  Bottom w10: U5.24 Q3.2@975.77,1092.69
RXD: J2.PIN5 U5.26 U6.40 | length 2248.3
  Top w8: U6.40@567.48,785.73 567.48,820.78 593.57,846.87 861.77,846.87 904,889.1 v1(904,957)
  Bottom w8: v2(732,36) 732,25 740,17 ; 741.14,18.14 1106.9,18.14 ccw(c1102.78,152.11) 1236.75,147.97 ; U5.26 862.49,1051.41 886.11,1051.41 904,1033.52 ; v1(897,883) 897,795.91 957.44,735.47 957.44,660.67 985,633.11 1173.98,633.11 1221.22,585.87 1221.22,511.06 1331.46,400.83 1331.46,302.4 1235.68,206.63 1235.68,147.97 ; v1(904,957) 904,1031
SCL: J2.PIN2 OLED1.18 R18.2 U2.8 U4.23 U6.39 | length 2156.6
  Top w8: U6.39@586.48,785.73 586.48,805.45 587.3,806.27 587.3,818.15 600.15,831 883.68,831 919.87,867.2 919.87,930.56 941.13,951.81 U2.8 977.13,947.11 977,946.98 984,939.98 v1(984,863)
  Top w10: v1(823.58,621.3) 847.2,621.3 861.32,607.18 U4.23 943.32,607.18 981.06,644.92 v1(981.06,676.42)
  Bottom w10: v1(823.58,621.3) 803.9,621.3 771.48,588.88 OLED1.18 771.48,462.52 824.87,409.13 889.6,409.13 1019.72,279 1159.14,279 1166.51,271.62 ; v2@877,77 v2(877,75) 1100.22,75 ; R18.2@975.4,865.4 948.75,838.75 948.75,775.66 981.06,743.35 v1(981.06,676.42) ; v1(984,863) 984,866.4 R18.2 ; 1101.88,75.02 ccw(c1100.22,142.85) 1167.54,134.33 1167.54,270.6
SDA: J2.PIN3 OLED1.19 OLED1.20 R17.2 U2.7 U4.24 U6.42 | length 2401.3
  Top w8: U6.42@527.48,785.73 527.48,837.01 569.09,878.62 809.25,878.62 862,931.37 862,975.45 888.36,1001.81 U2.7 1012.56,1001.81 1032.24,982.13 1032.24,861.7 985,814.45 v1(985,802.4)
  Top w10: v1(835.39,593.74) 841.64,587.49 U4.24 955.13,587.49 1008.62,640.98 v1(1008.62,656.73)
  Bottom w10: v2(831,64) 841.13,53.87 1089.24,53.87 ; v1(835.39,593.74) 815.71,593.74 799.96,577.99 799.96,516.84 OLED1.19 OLED1.20 827.48,447.52 848,427 895,427 ; 897,427 1027.13,296.87 1166.54,296.87 1189.82,273.59 1189.82,135.4 cw(c1095.92,149.13) 1089.24,54.46 ; R17.2 1008.62,779.1 v1(1008.62,656.73)
STAT1: J2.PIN7 U6.16 | length 988
  Top w10: v1@366.65,238.35 366.65,383.13 468.27,484.76 U6.16@468.27,527.79
  Bottom w10: v1@366,239 304.47,239 ccw(c308.73,151.27) 221,147 ccw(c302.3,149.7) 305,68.4 616.6,68.4 v1(629,56)
  other v1: 367,238
STAT2: J2.PIN8 U6.15 | length 958.2
  Top w10: v1(345,261) 345,386.77 447.77,489.54 447.77,526.98 U6.15@448.59,527.79
  Bottom w10: 202.53,157.24 ccw(c301.07,147.86) 303.97,48.91 569.09,48.91 v1(581,37) ; 203,157.71 203,164.47 ; 203.7,164.47 cw(c303.48,161.16) 300.47,260.95 ; 303.48,261 v1(345,261)
T1: T1.1 U6.20 | length 447.4
  Top w10: U6.20@547.48,527.8 547.48,475.96 602.93,420.51 875.49,420.51 T1.1@907,389
T2: T2.1 U6.18 | length 376.7
  Top w10: U6.18@507.64,527.8 507.64,359.36 528,339 T2.1@701,339 ; T2.1@702.87,357.13 T2.1@707.48,361.73
T3: T3.1 U6.17 | length 195.5
  Top w10: T3.1@450,348 487.95,385.95 U6.17@487.95,527.79
TXD: J2.PIN4 U5.25 U6.41 | length 2223.6
  Top w8: U6.41@547.48,785.73 547.48,825.51 584.72,862.75 849.72,862.75 v1(867,880.03) 867,883.03 882.51,898.54 882.51,973.51 889,980 v1(927,980)
  Bottom w7.87: U5.25@864.4,1074.91 892.09,1074.91 928,1039 927,1038 v1(927,980) ; v1(867,880.03) 867,869.64 881.19,855.45 881.19,776.29 939,718.48 939,647.61 970.61,616 1155.65,616 1201.54,570.12 1201.54,499.25 1303.9,396.89 1303.9,318.15 1216.87,231.13
  Bottom w8: v2(783,50) 796,37 1106,37 ccw(c1099.99,153.11) 1216.26,152.12 1216.26,230.51
V_LOAD: C14.1 R10.2 U1.1 U3.1 U3.20 | length 160.7
  Top w20: 389,921.01 406.52,921.01 416.99,931.48 416.99,940.99 v1(422.74,946.74)
  Bottom w20: 424.5,919.01 R10.2@424.5,966 ; R10.2 U1.1@489.72,963.5
  other v1: 413,922
VCC: "LED G.1" "LED O.1" C01.1 C02.1 C13.2 J2.PIN9 R03.1@491,894.5 U3.4 U3.9 U3.17 U3.18 U3.19 U5.7 U5.8 USB1.VBUS | length 3542.7
  Top w10: v1(307,1106) 307.36,1106 322.43,1090.94 ; U3.17 U3.18 U3.19 ; U3.9 324.31,1089.05 ; U3.18@344,911 v5@389.63,865.37 ; v5(388.37,865.37) v5@389.63,865.37 ; v5@391,864 v5@389.63,865.37 ; U3.4 451.76,1013.69 462.07,1024 462.07,1053.46 469.61,1061 582.64,1061 590.18,1053.46 590.18,981.52 511.66,903 R03.1@493.1,903 ; R03.1@491,894.5 475.5,894.5 475,894 418.26,894 v5@389.63,865.37 ; C02.1@718.5,1153 683.5,1153 C01.1 659,1140 678,1159 C02.1@718.5,1159
  Top w20: v1(201,928) 244,928 ; 246.13,925.87 290.36,881.64 314.64,881.64 U3.18@344,911
  Bottom w10: v1(307,1106) 334.13,1078.87 371.33,1078.87 382.1,1068.1 ; 429.66,1214 393.34,1214 382.1,1202.76 382.1,1068.1 ; v1(679,1156) 654.64,1156 641.94,1143.29 641.94,1022.39 649.48,1014.85 673.51,1014.85 U5.8 673.51,993.49 696,971 ; U5.7 698.87,968.44 698.87,833.13 716,816 716,779.85 696.9,760.75 652.64,760.75 603.39,810 411,810 389.75,831.25 389.75,863.99 v5(388.37,865.37) 388.37,1061.84 382.1,1068.1
  Bottom w20: 173.78,226.65 cw(c213.16,226.76) 173.78,226.76 ; 208.01,265.97 ccw(c217.77,223.08) 173.78,223.08 173.78,163.92 ccw(c301.64,150.89) 283.69,23.62 ; 211.22,269.18 211.22,918.69 ; 283.69,23 v2(532,23)
VOUT: R14.1 U3.14 U3.15 U3.16 V+.1 | length 604
  Top w10: U3.15 265.26,944.3 294.3,915.26 U3.16
  Top w20: 265.26,968 U3.15 261.02,950.39 255.55,955.87 189.45,955.87 152.64,919.06 152.64,850.95 184.59,819 v1(277.67,819) v1(299,819)
  Bottom w10: V+.1@277.9,818.1 277.9,687.1 v2(305,660)
pads on no net: OLED1.7 U1.4 U2.1 U2.2 U2.4 U3.6 U4.2 U4.3 U4.4 U4.5 U4.6 U4.7 U4.14 U4.15 U4.16 U4.17 U4.19 U4.21 U4.22 U5.1 U5.2 U5.9 U5.10 U5.11 U5.12 U5.13 U5.14 U5.15 U5.16 U5.17 U5.18 U5.19 U5.20 U5.21 U5.22 U5.23 U5.27 U6.5 U6.6 U6.7 U6.8 U6.11 U6.12 U6.13 U6.14 U6.25 U6.26 U6.27 U6.28 U6.29 U6.30 U6.31 U6.32 U6.33 U6.36 U6.38 U6.44 U6.45 U6.47 U6.48 U$2.NC USB1.1 USB1.ID
copper on no net: | length 942.2
  Top w7.87: 625.75,515.99 690.71,515.99 ; 844,730 844,779.59 852.6,788.19 924.19,788.19 928,792 v1(928,804)
  Top w8: 693.66,518.94 784.21,609.49 784.21,703.98 792.09,711.85 831.85,711.85 844,724 844,730
  Top w10: 527.48,527.8 528.61,526.67
  Bottom w7.87: v1@926.32,805.69 926.32,903.15 946.97,923.81 1072.81,923.81 1190,1041 v1(1190,1051)

## Polygon pours and split planes (outlines as drawn)
GND on Bottom "Bottom-GND" (solid, remove dead copper, pour order 0): -14.99,1448.53 1421.66,1448.53 1421.66,-2.47 -14.99,-2.47
GND on Top "Top-GND" (solid, remove dead copper, pour order 2): -13.63,1446.98 1402.73,1446.98 1402.73,-4.02 -13.63,-4.02

## Keep-outs
Keep-Out Layer:
  region: 12.56,782 221.22,782 221.22,263.03 12.56,263.03
  lines w3.94: 2.48,301.73 ccw(c52.48,301.73) 52.48,251.73 cw(c52.48,151.73) 152.48,151.73 ccw(c302.48,151.73) 302.48,1.73 1102.48,1.73 ccw(c1102.48,151.73) 1252.48,151.73 cw(c1352.48,151.73) 1352.48,251.73 ccw(c1352.48,301.73) 1402.48,301.73 1402.48,1151.73 ccw(c1352.48,1151.73) 1352.48,1201.73 cw(c1352.48,1301.73) 1252.48,1301.73 ccw(c1102.48,1301.73) 1102.48,1451.73 302.48,1451.73 ccw(c302.48,1301.73) 152.48,1301.73 cw(c52.48,1301.73) 52.48,1201.73 ccw(c52.48,1151.73) 2.48,1151.73 2.48,301.73

## Other copper
Bottom:
  rectangle net V_LOAD: 404,879 449,980
  rectangle net RESET: 947,1184 1056,1243

## Silkscreen, mask and mechanical layers (free items; w line width, h text height)
Document:
  lines w3.94: 2.48,297.8 ccw(c52.48,297.8) 52.48,247.8 cw(c52.48,147.8) 152.48,147.8 ccw(c302.48,147.8) 302.48,-2.2 1102.48,-2.2 ccw(c1102.48,147.8) 1252.48,147.8 cw(c1352.48,147.8) 1352.48,247.8 ccw(c1352.48,297.8) 1402.48,297.8 1402.48,1147.8 ccw(c1352.48,1147.8) 1352.48,1197.8 cw(c1352.48,1297.8) 1252.48,1297.8 ccw(c1102.48,1297.8) 1102.48,1447.8 302.48,1447.8 ccw(c302.48,1297.8) 152.48,1297.8 cw(c52.48,1297.8) 52.48,1197.8 ccw(c52.48,1147.8) 2.48,1147.8 2.48,297.8
tKeepout:
  region: 240.91,1201.73 577.79,1201.73 642.48,1137.05 642.48,1085.87 685.79,1042.56 685.79,889.02 252.72,889.02 240.91,900.83

## Text inside footprints (layer, text, board x,y; h text height)
LED5: bDocu "C" at 1359.02,404.01 h23.62 r180; bDocu "A" at 1359.02,507.13 h23.62 r180
LED6: bDocu "C" at 1276,284.01 h23.62 r315; bDocu "A" at 1203.08,211.09 h23.62 r315
LED11: bDocu "C" at 1289.44,1161.01 h23.62 r225; bDocu "A" at 1216.53,1233.92 h23.62 r225
LED12: bDocu "C" at 1347.2,1000.01 h23.62; bDocu "A" at 1347.2,896.89 h23.62
"LED G": bDocu "C" at 525,1210.06 h15.5 r270; bDocu "A" at 421.88,1210.06 h15.5 r270
"LED O": bDocu "C" at 304,1217.94 h15.5 r90; bDocu "A" at 407.12,1217.94 h15.5 r90
OLED1: bDocu "1" at 310.75,621.73 h23.62 r90.02; bDocu "10" at 558.78,617.73 h23.62 r90.02; bDocu "20" at 832.48,617.73 h23.62 r90.02; bDocu "30" at 1114.48,617.73 h23.62 r90.02